# Altium PCB PCB1.PcbDoc
Units mil, origin at the board's own origin, x right, y up, seen from the top; angles counter-clockwise.
Board outline 2559.06 x 1574.8 mil, 2 copper layers (Top Layer, Bottom Layer); 31 components, 24 nets, 129 pads, 7 vias.
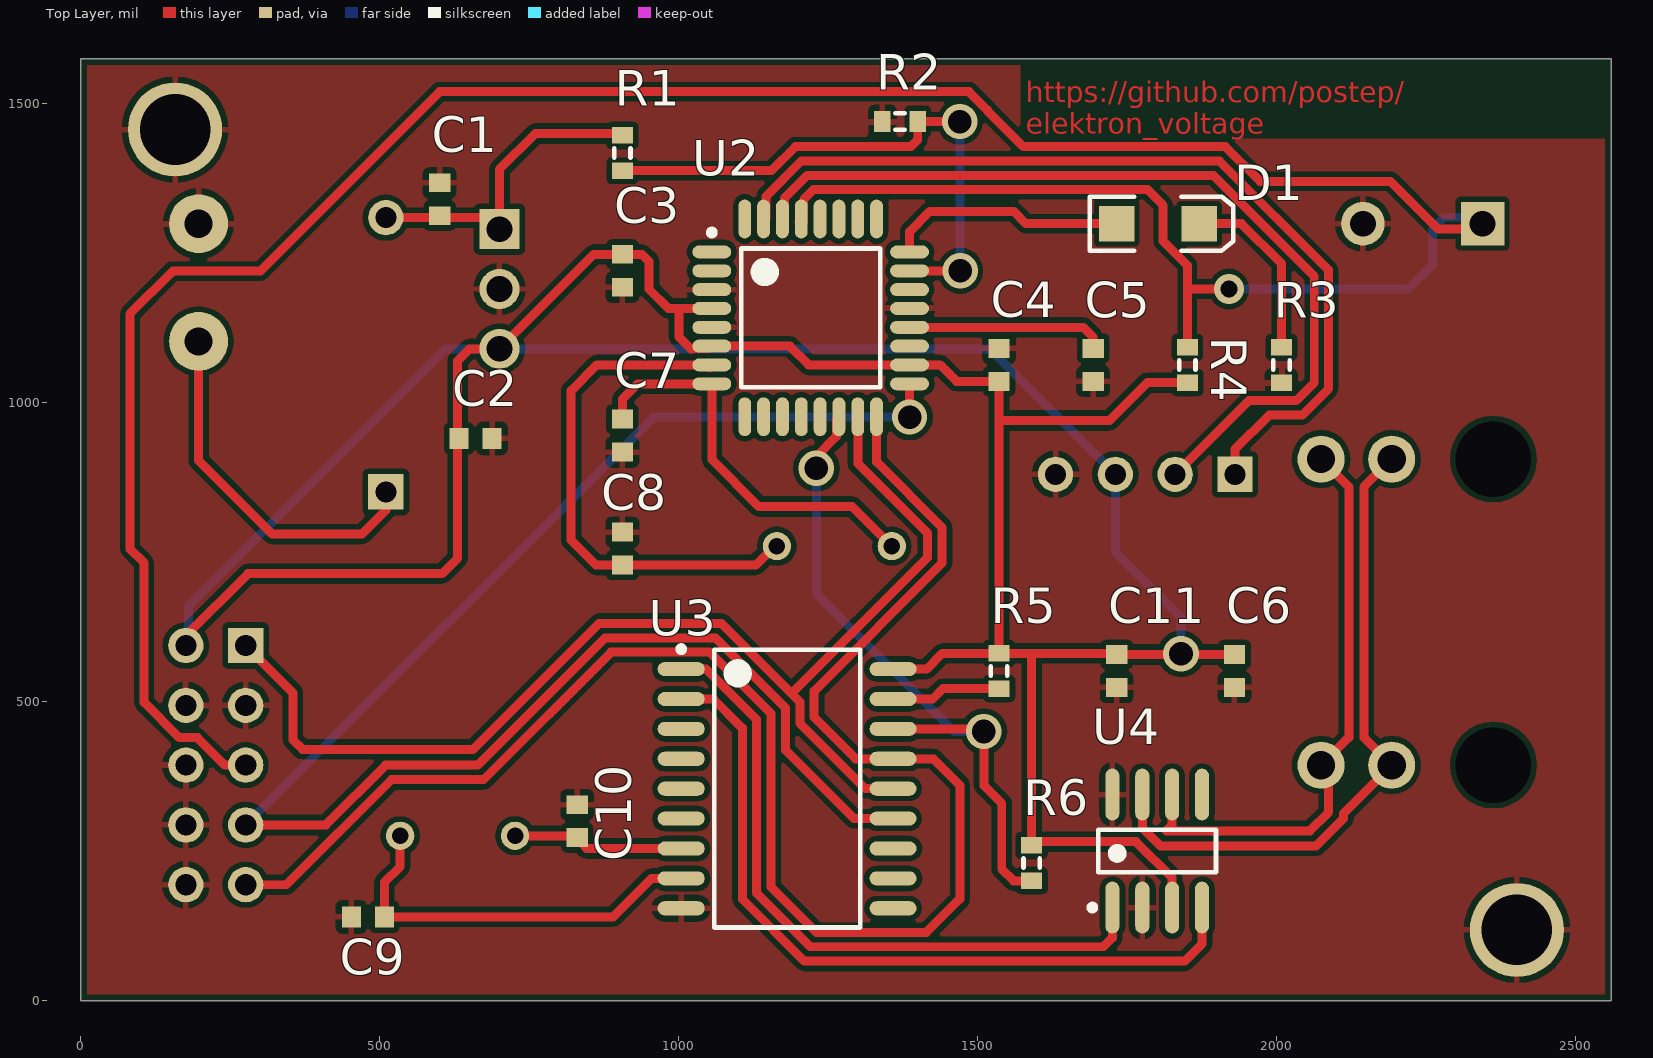
[diagram p0: Top Layer view]
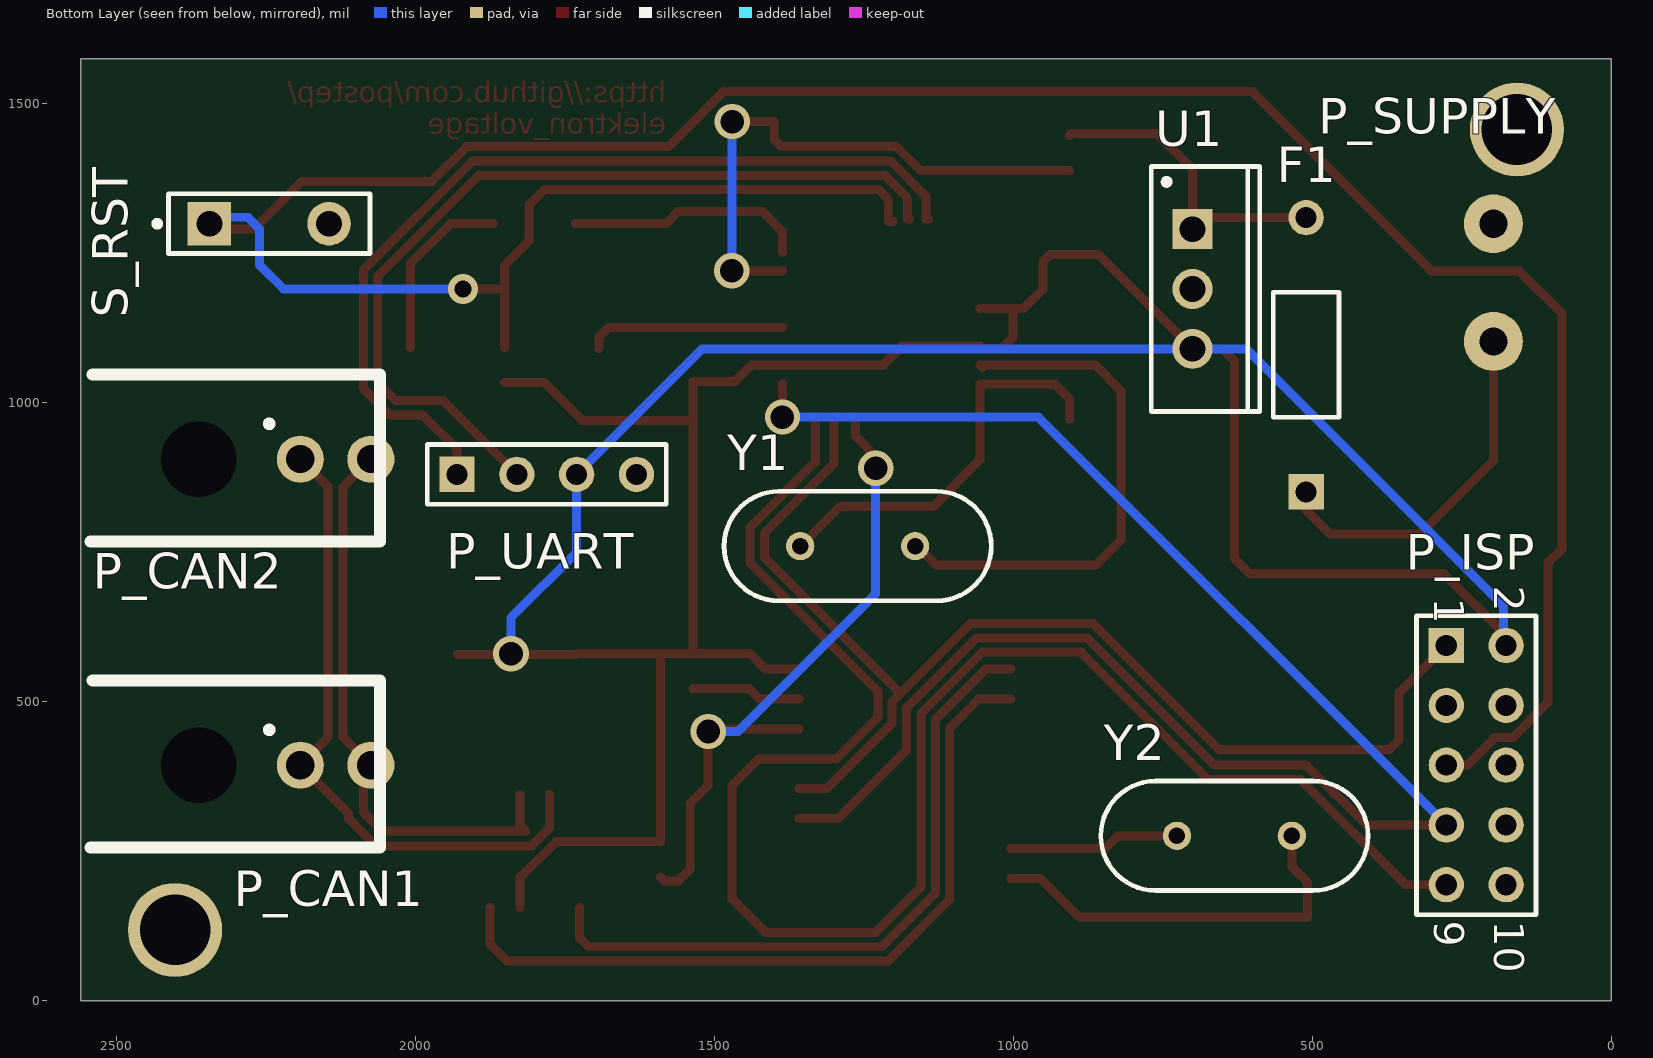
[diagram p1: Bottom Layer view, seen from below]

## Layer stack, top to bottom
Top Solder: solder mask 0.4, Solder Resist, Dk 3.5
Top Layer: signal copper 1.4
Dielectric 1: dielectric 12.6, FR-4, Dk 4.8
Bottom Layer: signal copper 1.4
Bottom Solder: solder mask 0.4, Solder Resist, Dk 3.5

## Board outline
0,0 0,1574.8 2559.06,1574.8 2559.06,0

## Design rules (kind name [scope] priority, off if disabled: settings)
BoardOutlineClearance [All] p1: gap=10 ignorepadtopadclearanceinfootprint=FALSE except(0: Arc-SplitContinuation Track-SplitContinuation SMDPad-SplitContinuation THPad-SplitContinuation Via-SplitContinuation Fill-SplitContinuation Poly-SplitContinuation Region-SplitContinuation Text-SplitContinuation)
Clearance [All] p1: gap=9 ignorepadtopadclearanceinfootprint=FALSE
DiffPairsRouting [All] p1: maxlimit=10 minlimit=10 mostfreqgap=10 toplayer_minwidth=15 toplayer_maxwidth=15 toplayer_prefwidth=15 bottomlayer_minwidth=15 bottomlayer_maxwidth=15 bottomlayer_prefwidth=15 maxuncoupledlength=500
HoleToHoleClearance [All] p1: gap=6 allowstackedmicrovias=TRUE
MinimumSolderMaskSliver [All] p1: minsoldermaskwidth=6
PolygonConnect [All] p1: connectstyle=Relief reliefconductorwidth=10 reliefentries=4 polygonreliefangle="90 Angle" airgapwidth=10
RoutingVias [All] p1: holewidth=28 width=50 viastyle="Through Hole" minholewidth=28 minwidth=50 maxholewidth=28 maxwidth=50
SilkToSolderMaskClearance [IsPad] p1: minsilkscreentomaskgap=6 clearancetoexposedcopper=TRUE
SolderMaskExpansion [All] p1: expansion=0
Width [All] p1: maxlimit=15 minlimit=15 preferedwidth=15
26 further rules are at their usual default settings.

## Classes and differential pairs
differential pair CAN: +CAN_P -CAN_N

## Components (designator, comment, footprint, x,y, rotation, side; value= is the part's Value field where it differs from the comment)
C1 "Cap Semi" 1608[0603] 600,1340 r90 top value=330nF
C2 "Cap Semi" 1608[0603] 660,940 r0 top value=100nF
C3 "Cap Semi" 1608[0603] 905.51,1220.47 r270 top value=100nF
C4 "Cap Semi" 1608[0603] 1535.43,1062.99 r90 top value=100nF
C5 "Cap Semi" 1608[0603] 1692.91,1062.99 r270 top value=100nF
C6 "Cap Semi" 1608[0603] 1929.13,551.18 r270 top value=100nF
C7 "Cap Semi" 1608[0603] 905.51,944.88 r90 top value=22pF
C8 "Cap Semi" 1608[0603] 905.51,755.91 r270 top value=22pF
C9 "Cap Semi" 1608[0603] 480,140 r0 top value=22pF
C10 "Cap Semi" 1608[0603] 830,300 r270 top value=22pF
C11 "Cap Semi" 1608[0603] 1732.28,551.18 r270 top value=100nF
D1 "LED2" 3.2X1.6X1.1 1801.18,1299.21 r0 top
F1 "Fuse Thermal" PIN-W2/E2.8 510,1080 r90 bottom
P_CAN1 "Microfit 2" mx2x1 2362.2,393.7 r270 bottom
P_CAN2 "Microfit 2" mx2x1 2362.2,905.51 r270 bottom
P_ISP "Header 5X2" HDR2X5 275.59,593.7 r270 bottom
P_SUPPLY "BUCHANAN7744" BUCHANAN7744 196.85,984.25 r90 bottom
P_UART "Header 4" HDR1X4 1930,880 r180 bottom
R1 "Res3" J1-0603 905.51,1417.32 r90 top value=5K
R2 "Res3" J1-0603 1370,1470 r0 top value=1K
R3 "Res3" J1-0603 2007.87,1062.99 r90 top value=330
R4 "Res3" J1-0603 1850.39,1062.99 r270 top value=10K
R5 "Res3" J1-0603 1535.43,551.18 r90 top value=10K
R6 "Res3" J1-0603 1590,230 r90 top value=10K
S_RST "SW-PB" SPST-2 2244.09,1299.21 r180 bottom
U1 "L7805CV" TO220 700,1190 r270 bottom
U2 "ATmega8A-AU" 32A_N 1220.47,1141.73 r0 top
U3 "MCP2515-I/SO" SOIC-SO18_L 1181.1,354.33 r0 top
U4 "MCP2551-E/SN" SOIC-SN8_N 1800,250 r90 top
Y1 "FOXSLF/120-20" FOX-FOXSLF-2_V 1260,760 r180 bottom value=16MHz
Y2 "FOXSLF/120-20" FOX-FOXSLF-2_V 629.92,275.59 r0 bottom value=12MHz

## Footprints (in the part's own frame and the unit in brackets; to place one, negate y for a bottom-side part, rotate by r counter-clockwise, add the part's x,y. Pads: shape width x height; smd on the part's side, far side on the other; paste and mask are expansions set on the pad)
3.2X1.6X1.1 [mm] "SMT LED; 2 Flat Leads"
  rect 1.5x1.5 smd: 1(-1.75,0) 2(1.75,0)
  silkscreen extent -2.9,-1.15 3.2,1.15
32A_N [mm] "Thin QFP, 32-Leads, Body 7x7mm, Pitch 0.8mm, IPC Medium Density"
  oval 1.65x0.55 smd: 1(-4.2,2.8) 2(-4.2,2) 3(-4.2,1.2) 4(-4.2,0.4) 5(-4.2,-0.4) 6(-4.2,-1.2) 7(-4.2,-2) 8(-4.2,-2.8) 17(4.2,-2.8) 18(4.2,-2) 19(4.2,-1.2) 20(4.2,-0.4) 21(4.2,0.4) 22(4.2,1.2) 23(4.2,2) 24(4.2,2.8)
  oval 0.55x1.65 smd: 9(-2.8,-4.2) 10(-2,-4.2) 11(-1.2,-4.2) 12(-0.4,-4.2) 13(0.4,-4.2) 14(1.2,-4.2) 15(2,-4.2) 16(2.8,-4.2) 25(2.8,4.2) 26(2,4.2) 27(1.2,4.2) 28(0.4,4.2) 29(-0.4,4.2) 30(-1.2,4.2) 31(-2,4.2) 32(-2.8,4.2)
  silkscreen extent -4.32,-2.95 2.95,3.75, body extent -3.5,-3.5 3.5,3.5, height 1.2
1608[0603] [mm] "Chip Capacitor, Body 1.6x0.8mm, IPC High Density"
  rect 0.8x0.9 smd: 1(-0.7,0) 2(0.7,0)
  body extent -0.87,-0.48 0.87,0.48, height 1.3
BUCHANAN7744 [mm]
  round 2.5 hole 1.2: 1(3,0) 2(8,0)
  body extent 0,-4 11,4, height 13
FOX-FOXSLF-2_V [mm] "THD, 2-Leads, Body 11.35x4.65mm, Pitch 4.88mm"
  round 1.2 hole 0.7: 1(-2.44,0) 2(2.44,0)
  silkscreen extent -5.68,-2.32 5.68,2.32, body extent -5.67,-2.32 5.68,2.33, height 3.6
HDR1X4 [mm] "Connector; Header; 4 Position"
  rect 1.5x1.5 hole 0.9: 1(0,0)
  round 1.5 hole 0.9: 2(2.54,0) 3(5.08,0) 4(7.62,0)
  silkscreen extent -1.27,-1.27 8.89,1.27
HDR2X5 [mm] "Connector; Header; 5x2 Position"
  rect 1.5x1.5 hole 0.9: 1(0,0)
  round 1.5 hole 0.9: 2(0,2.54) 3(2.54,0) 4(2.54,2.54) 5(5.08,0) 6(5.08,2.54) 7(7.62,0) 8(7.62,2.54) 9(10.16,0) 10(10.16,2.54)
  silkscreen extent -1.27,-1.27 11.43,3.81
J1-0603 [mm] "Chip Resistor, Body 1.6x0.8mm, IPC High Density"
  rect 0.7x0.9 smd: 1(-0.75,0) 2(0.75,0)
  silkscreen extent -0.2,-0.35 0.2,0.35, body extent -0.85,-0.48 0.85,0.48, height 0.9
mx2x1 [mm] "right_angle"
  round 2 hole 1.2: 1(0,4.32) 2(0,7.32)
  round 0 hole 3.2 unplated: ""(0,0)
  silkscreen extent -3.6,-4.6 3.5,7.7, body extent -3.58,-4.6 3.57,7.64, height 8.83
PIN-W2/E2.8 [mm] "Thru-Hole; 2 Leads"
  rect 1.5x1.5 hole 0.9: 1(-5.825,0)
  round 1.5 hole 0.9: 2(5.825,0)
  silkscreen extent -2.65,-1.4 2.65,1.4
SOIC-SN8_N [mm] "SOIC, 8-Leads, Body 4.9x3.9mm, Pitch 1.27mm, IPC Medium Density"
  oval 2.2x0.6 smd: 1(-2.4,1.905) 2(-2.4,0.635) 3(-2.4,-0.635) 4(-2.4,-1.905) 5(2.4,-1.905) 6(2.4,-0.635) 7(2.4,0.635) 8(2.4,1.905)
  silkscreen extent -2.52,-2.5 0.9,2.88, body extent -2,-2.5 2,2.5, height 1.75
SOIC-SO18_L [mm] "SOIC, 18-Leads, Body 11.6x7.5mm, Pitch 1.27mm, IPC High Density"
  oval 2x0.6 smd: 1(-4.5,5.08) 2(-4.5,3.81) 3(-4.5,2.54) 4(-4.5,1.27) 5(-4.5,0) 6(-4.5,-1.27) 7(-4.5,-2.54) 8(-4.5,-3.81) 9(-4.5,-5.08) 10(4.5,-5.08) 11(4.5,-3.81) 12(4.5,-2.54) 13(4.5,-1.27) 14(4.5,0) 15(4.5,1.27) 16(4.5,2.54) 17(4.5,3.81) 18(4.5,5.08)
  silkscreen extent -4.62,-5.9 3.1,6.05, body extent -3.8,-5.87 3.8,5.87, height 2.65
SPST-2 [mm] "Switch; 2 Leads"
  rect 1.85x1.85 hole 1.1: 1(-2.54,0)
  round 1.85 hole 1.1: 2(2.54,0)
  silkscreen extent -4.89,-1.27 4.28,1.27
TO220 [mm] "TO, Thru-Hole, Vertical, Heatsink Mounted; 3 In-Line Leads; Pitch 2.54 mm"
  rect 1.7x1.7 hole 1.1: 1(-2.54,0)
  round 1.7 hole 1.1: 2(0,0) 3(2.54,0)
  silkscreen extent -5.2,-1.75 5.2,2.85, body extent -5.25,-1.8 5.25,2.9, height 19.7

## Part data
C1 C2 C3 C4 C5 C6 C7 C8 C9 C10 C11: "Capacitor (Semiconductor SIM Model)", LatestRevisionDate=29-May-2009, LatestRevisionNote="IPC-7351 Footprint Added.", PackageDescription="Chip Capacitor", PackageReference=C1206, Published=8-Jun-2000, Publisher="Altium Limited"
D1: "Typical RED, GREEN, YELLOW, AMBER GaAs LED", LatestRevisionDate=17-Jul-2002, LatestRevisionNote="Re-released for DXP Platform.", PackageDescription="SM LED; 2 Flat Leads", PackageReference=3.2X1.6X1.1, PackageVersion=Feb-2002, Published=8-Jun-2000, Publisher="Altium Limited"
F1: "Thermal Fuse", LatestRevisionDate=17-Jul-2002, LatestRevisionNote="Re-released for DXP Platform.", PackageDescription="Thru-Hole; 2 Leads", PackageReference=PIN-W2/E2.8, Published=24-Mar-1999, Publisher="Altium Limited"
P_CAN1 P_CAN2: library part MX2, "Microfit 2x1"
P_ISP: "Header, 5-Pin, Dual row", LatestRevisionDate=17-Jul-2002, LatestRevisionNote="Re-released for DXP Platform.", Publisher="Altium Limited"
P_UART: "Header, 4-Pin", LatestRevisionDate=17-Jul-2002, LatestRevisionNote="Re-released for DXP Platform.", Publisher="Altium Limited"
R1 R2 R3 R4 R5 R6: "Resistor", LatestRevisionDate=29-May-2009, LatestRevisionNote="IPC-7351 Footprint Added.", PackageDescription="Chip Resistor", PackageReference=J1-0603, Published=8-Jun-2000, Publisher="Altium Limited"
S_RST: "Switch", LatestRevisionDate=17-Jul-2002, LatestRevisionNote="Re-released for DXP Platform.", PackageDescription="Switch; 2 Leads", PackageReference=SPST-2, Published=24-Mar-1999, Publisher="Altium Limited"
U1: library part CMP-0244-00483-1, "Positive Voltage Regulator, 5V, 3-Pin TO-220", ComponentLink1Description="Manufacturer URL", ComponentLink1URL=http://www.st.com, ComponentLink2Description=Datasheet, ComponentLink2URL=http://www.st.com/internet/com/TECHNICAL_RESOURCES/TECHNICAL_LITERATURE/DATASHEET/CD00000444.pdf, ComponentLink3Description="Package Specification", ComponentLink3URL=http://www.st.com/internet/com/TECHNICAL_RESOURCES/TECHNICAL_LITERATURE/PACKAGE_INFORMATION/CD00004649.pdf, DatasheetVersion=16/11/2011, PackageDescription="TO, Thru-Hole, Vertical, Heatsink Mounted; 3 In-Line Leads; Pitch 2.54 mm", PackageReference=TO220, PackageVersion=ver3.0
U2: library part CMP-0095-00219-2, "8-bit AVR Microcontroller, 2.7-5.5V, 16MHz, 8KB Flash, 512 Bytes EEPROM, 1KB SRAM, 32-pin TQFP, Industrial Grade (-40°C to 85°C)", Code_JEDEC=MS-026-ABA, ComponentLink1Description="Manufacturer URL", ComponentLink1URL=http://www.atmel.com/, ComponentLink2Description="ATmega8A Datasheet", ComponentLink2URL=http://www.atmel.com/dyn/resources/prod_documents/doc8159.pdf, ComponentLink3Description="ATmega8A Summary", ComponentLink3URL=http://www.atmel.com/dyn/resources/prod_documents/8159S.pdf, DatasheetVersion="revD, Feb-2011", PackageDescription="32-Lead, 7x7x1.0 mm Body, 0.8mm Lead Pitch, Thin Profile Plastic Quad Flat Package (TQFP)", PackageReference=32A, PackageVersion="revC, Oct-2010", RevisionNote="DatasheetVersion & PackageVersion updated. URLs added."
U3: library part CMP-0186-00133-2, "Stand-Alone CAN Controller With SPI Interface, 18-Pin SOIC, Industrial Temperature", Code_JEDEC=MS-013, ComponentLink1Description="Manufacturer URL", ComponentLink1URL=http://www.microchip.com/, ComponentLink2Description=Datasheet, ComponentLink2URL=http://ww1.microchip.com/downloads/en/DeviceDoc/21801f.pdf, ComponentLink3Description="Package Specification", ComponentLink3URL=http://www.microchip.com/stellent/groups/techpub_sg/documents/packagingspec/en012702.pdf, DatasheetVersion="revF, Oct-2010", PackageDescription="18-Lead Plastic Small Outline (SO) - Wide 7.50mm Body [SOIC]", PackageReference=SOIC-SO18, PackageVersion="revBB, Aug-2009", RevisionNote="URLs added. DatasheetVersion updated."
U4: library part CMP-0186-00038-2, "High-Speed CAN Transceiver, 8-Pin SOIC, Extended Temperature", Code_IPC=SOIC127P600-8, Code_JEDEC=MS-012, ComponentLink1Description="Manufacturer URL", ComponentLink1URL=http://www.microchip.com/, ComponentLink2Description=Datasheet, ComponentLink2URL=http://ww1.microchip.com/downloads/en/DeviceDoc/21667F.pdf, ComponentLink3Description="Package Specification", ComponentLink3URL=http://www.microchip.com/stellent/groups/techpub_sg/documents/packagingspec/en012702.pdf, DatasheetVersion="revF, Jul-2010", PackageDescription="8-Lead Plastic Small Outline (SN) - Narrow, 3.90mm Body [SOIC]", PackageReference=SOIC-SN8, PackageVersion="revBB, Aug-2009", RevisionNote="URLs added. DatasheetVersion updated."
Y1 Y2: library part CMP-1749-00004-1, "Resistance Weld Thru-Hole Crystal, 12 MHz, +/-30 ppm, -20 to 70 degC, 2-Pin THD, RoHS, Bulk", Case\Package=TO-251-3, Input Capacitance="350 pF", Max Operating Temperature="150 degC", Max Power Dissipation="2.5 W", Min Operating Temperature="-55 degC", Package Quantity=70, ComponentLink1Description="Manufacturer URL", ComponentLink1URL=http://www.foxonline.com/, ComponentLink2Description=Datasheet, ComponentLink2URL=http://www.foxonline.com/pdfs/hc49slf.pdf, DatasheetVersion=Mar-15, Elements=1, Height="6.1 mm", Length="6.6 mm", Mount="Through Hole", PackageDescription="2-Pin Through Hole Device, Body 11.35 x 4.65 mm, Pitch 4.88 mm", PackageReference=FOXSLF-2, Packaging=Rail/Tube, Pins=3, Radiation Hardening=No, Rds On Max="115 mohm", REACH SVHC="No SVHC", RoHSCompliant=true, Typical Rise Time="90 ns", Width="2.3 mm"

## Free pads (board coordinates)
  round 157.48 hole 118.11 unplated: 2(157.48,1456.69) 3(2401.57,118.11)

## Via types
v1: diameter 59.06, hole 39.37, Top Layer to Bottom Layer, 5 vias
v2: diameter 60, hole 40, Top Layer to Bottom Layer, 1 vias
v3: diameter 50, hole 28, Top Layer to Bottom Layer, 1 vias

## Nets (pads, with @x,y where several pads share a name; then routed paths per layer and width w, separated by ;. In a path a pad name is that pad's centre, name@x,y a point inside that pad or via, vN(x,y) a via of type N, cw(c..) or ccw(c..) an arc to the next point about the centre after c; other vN are vias at no path point)
CAN_N: P_CAN1.2 P_CAN2.2 U4.6 | length 983.1
  Top Layer w15: U4.6 1825,293.68 1815.31,283.99 1815.45,283.85 2055.5,283.85 2086.61,314.96 2086.61,381.1 P_CAN1.2 2120.57,440.26 2120.57,858.96 P_CAN2.2
CAN_P: P_CAN1.1 P_CAN2.1 U4.7 | length 1096.4
  Top Layer w15: U4.7 1775,288.94 1805.09,258.85 2065.86,258.85 2073.18,266.17 2104.29,297.28 2111.61,304.61 2111.61,313.19 P_CAN1.1 2145.57,440.26 2145.57,858.96 P_CAN2.1
GND: C1.2 C2.2 C3.2 C4.2 C5.2 C6.2 C7.1 C8.1 C9.1 C10.1 C11.2 P_ISP.3 P_ISP.4 P_ISP.6 P_ISP.8 P_ISP.10 P_SUPPLY.2 P_UART.4 pad.2 pad.3 R2.1 R3.1 S_RST.2 U1.2 U2.3 U2.5 U2.21 U3.9 U4.2 U4.8
MISO: P_ISP.9 U2.16 U3.15 | length 2860
  Top Layer w15: P_ISP.9 343.7,193.7 519.7,369.7 673.6,369.7 886.54,582.64 1051.3,582.64 1154.22,479.72 1154.22,189.72 1229.94,114 1414,114 1470,170 1470,360 1425.67,404.33 U3.15 1295.67,404.33 1226.22,473.78 1226.22,517.63 1440,731.42 1440,791.42 1330.71,900.71 U2.16
MOSI: P_ISP.1 U2.15 U3.14 | length 2030.4
  Top Layer w15: P_ISP.1 354.56,514.73 354.56,436.08 370.64,420 656.02,420 866.66,630.64 1071.18,630.64 1190.91,510.91 ; U2.15 1299.21,898.26 1416,781.48 1416,741.36 1190.91,516.27 1190.91,510.91 ; U3.14 1311.73,354.33 1202.22,463.84 1202.22,499.61 1190.91,510.91
NetC1_1: C1.1 F1.2 R1.2 U1.1 | length 529.7
  Top Layer w15: F1.2 680.67,1309.33 U1.1 700,1390 760,1450 902.36,1450 R1.2
NetC5_1: C5.1 U2.20 | length 332.6
  Top Layer w15: U2.20 1675.98,1125.98 1692.91,1109.06 C5.1
NetC7_2: C7.2 U2.8 Y1.1 | length 681
  Top Layer w15: C7.2 905.51,1005.51 931.5,1031.5 U2.8 1055.12,904.88 1133.78,826.22 1289.85,826.22 Y1.1
NetC8_2: C8.2 U2.7 Y1.2 | length 883.1
  Top Layer w15: U2.7@1050.95,1058.82 U2.7 862.99,1062.99 820,1020 820,770 861.65,728.35 C8.2 1128.35,728.35 1160,760 Y1.2
NetC9_2: C9.2 U3.8 Y2.1 | length 669.5
  Top Layer w15: Y2.1 533.86,223.86 507.56,197.56 C9.2 890,140 954.33,204.33 U3.8
NetC10_2: C10.2 U3.7 Y2.2 | length 286.8
  Top Layer w15: Y2.2 824.41,275.59 845.67,254.33 U3.7
NetD1_1: D1.1 U2.24 | length 402.8
  Top Layer w15: U2.24 1385.83,1285.83 1419.65,1319.65 1559.98,1319.65 1580.42,1299.21 D1.1
NetD1_2: D1.2 R3.2 | length 305.2
  Top Layer w15: D1.2 1940.79,1299.21 2007.87,1232.13 R3.2
NetF1_1: F1.1 P_SUPPLY.1 | length 610.6
  Top Layer w15: P_SUPPLY.1 196.85,903.15 320,780 470,780 510,820 F1.1
NetR1_1: R1.1 R2.2 U2.23 | length 950.8
  Top Layer w15: R1.1 1154.81,1387.8 1195.08,1428.07 1388.07,1428.07 1399.53,1439.53 R2.2 v1(1470,1470) ; U2.23 v1(1470.47,1220.47)
  Bottom Layer w15: v1(1470,1470) 1470.47,1469.53 v1(1470.47,1220.47)
NetR5_1: R5.1 U3.17 | length 184.3
  Top Layer w15: U3.17 1424.33,504.33 1441.65,521.65 R5.1
NetR6_1: R6.1 U2.14 U3.16 | length 1144.3
  Top Layer w15: v1(1230,890) 1230,909.86 1263.55,943.41 1263.55,972.21 U2.14 ; U3.16 1505.67,454.33 v1(1510,450) 1510,360 1540,330 1540,220 1560,200 1583.31,200 R6.1@1590,206.69
  Bottom Layer w15: v1(1230,890) 1230,680 1460,450 v1(1510,450)
NetU3_1: U3.1 U4.1 | length 1140
  Top Layer w15: U3.1 1045.67,554.33 1130.22,469.78 1130.22,179.78 1220,90 1710,90 1725,105 U4.1
NetU3_2: U3.2 U4.4 | length 1292.6
  Top Layer w15: U3.2 1057.67,504.33 1106.22,455.78 1106.22,169.84 1210.06,66 1846,66 1875,95 U4.4
RST: P_ISP.5 R4.1 S_RST.1 U2.29 | length 4889.8
  Top Layer w15: P_ISP.5 240.68,393.7 194.66,439.73 164.47,439.73 105.56,498.64 105.56,731.88 82,755.44 82,1148.33 153.67,1220 300,1220 600,1520 1485.09,1520 1516.03,1489.07 1516.03,1488.19 1576.15,1428.07 1913.99,1428.07 1972.06,1370 2190,1370 2270,1290 2334.88,1290 S_RST.1 ; U2.29@1200.55,1302.92 1208.89,1302.92 1208.89,1340.06 1224.9,1356.07 1783.93,1356.07 1810,1330 1810,1270 1850.39,1229.61 1850.39,1190 ; R4.1 1850.39,1190 ; v3(1920,1190) 1850.39,1190
  Bottom Layer w15: v3(1920,1190) 2220,1190 2260,1230 2260,1290 2280,1310 2333.31,1310 S_RST.1
SCK: P_ISP.7 U2.17 U3.13 | length 2827.3
  Top Layer w15: P_ISP.7 409.76,293.7 509.76,393.7 663.66,393.7 876.6,606.64 1061.24,606.64 1178.22,489.67 1178.22,419.19 1293.07,304.33 U3.13 ; v1(1385.83,975.83) U2.17
  Bottom Layer w15: P_ISP.7 957.72,975.83 v1(1385.83,975.83)
UART_RX: P_UART.2 U2.30 | length 1484
  Top Layer w15: U2.30 1176.55,1307.09 1176.55,1341.66 1214.96,1380.07 1893.87,1380.07 1966.85,1307.09 1967.09,1307.09 1967.09,1306.85 2062.61,1211.33 2062.61,1033.37 2032.43,1003.18 1953.18,1003.18 P_UART.2
UART_TX: P_UART.1 U2.31 | length 1521.4
  Top Layer w15: U2.31 1145.9,1307.09 1145.9,1344.95 1205.02,1404.07 1904.05,1404.07 2086.61,1221.5 2086.61,1023.43 2042.37,979.18 1987.42,979.18 1930,921.77 P_UART.1
VCC: C2.1 C3.1 C4.1 C6.1 C11.1 P_ISP.2 P_UART.3 R4.2 R5.2 R6.2 U1.3 U2.4 U2.6 U2.18 U3.18 U4.3 | length 6275.6
  Top Layer w15: P_ISP.2 175.59,610.03 279.56,714 604,714 630,740 630,1070 650,1090 U1.3 858.03,1248.03 C3.1 938.03,1248.03 950,1236.06 950,1190 982.52,1157.48 1000,1157.48 ; U2.4 1000,1157.48 ; U3.18 1414.33,554.33 1440.71,580.71 R5.2 ; U4.3 1825,205 1764.25,265.75 1590,265.75 1590,580.71 ; R4.2 1783.46,1033.46 1720,970 1535.43,970 ; C6.1 C11.1 1730.32,580.71 1590,580.71 ; 1000,1157.48 1000,1110 1020,1090 1021.83,1090 1021.83,1090.32 1050.95,1090.32 U2.6 1185.51,1094.49 1217.01,1062.99 U2.18 1437.01,1062.99 1464.57,1035.43 C4.1 1535.43,970 ; R5.2 1535.43,970 ; R5.2 1590,580.71
  Bottom Layer w15: P_ISP.2 189.65,607.76 180,617.4 180,660 610,1090 U1.3 1520,1090 P_UART.3 1730,750 1840,640 v2(1840,580)
pads on no net: P_CAN1. P_CAN2. U2.1 U2.2 U2.9 U2.10 U2.11 U2.12 U2.13 U2.19 U2.22 U2.25 U2.26 U2.27 U2.28 U2.32 U3.3 U3.4 U3.5 U3.6 U3.10 U3.11 U3.12 U4.5

## Polygon pours and split planes (outlines as drawn)
GND on Top Layer "Top Layer-No Net" (solid, pour order 0): 0,0 2570,0 2570,1580 0,1580

## Other copper
Top Layer:
  text "https://github.com/postep/ / elektron_voltage" at 1580,1450 h35

## Text inside footprints (layer, text, board x,y; h text height)
P_ISP: Bottom Overlay "2" at 195.59,693.7 h50 r90; Bottom Overlay "1" at 295.59,673.7 h50 r90; Bottom Overlay "9" at 295.59,133.7 h50 r90; Bottom Overlay "10" at 195.59,133.7 h50 r90